# EAGLE board boost_converter2 (EAGLE 9.6.1)
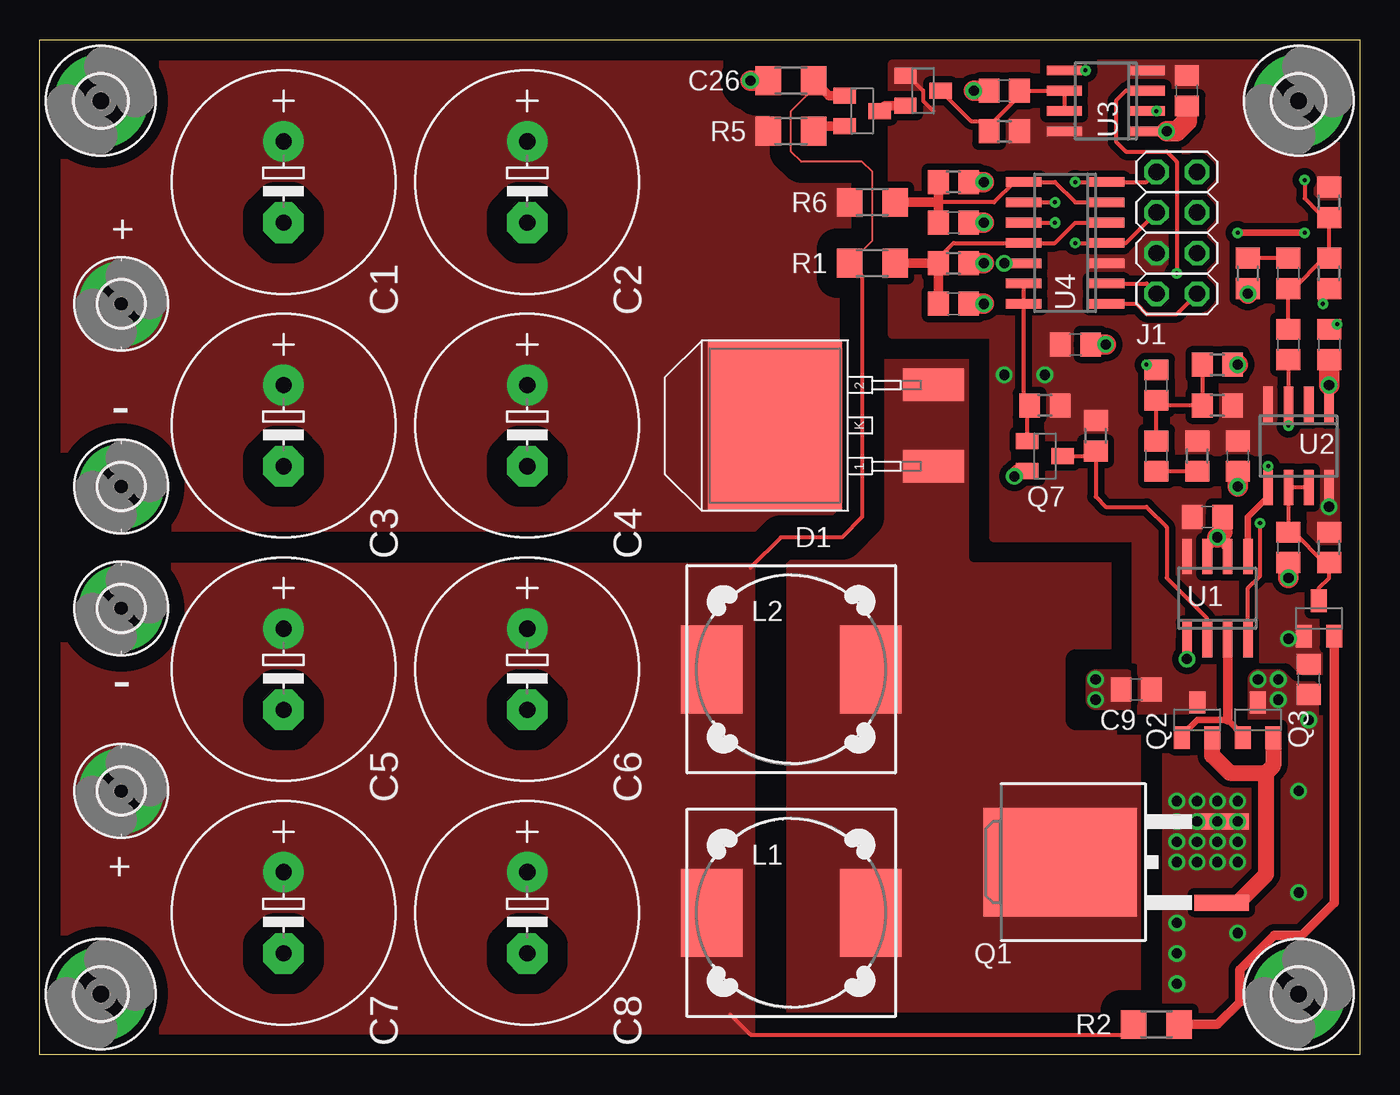
[diagram p0: board, top side]
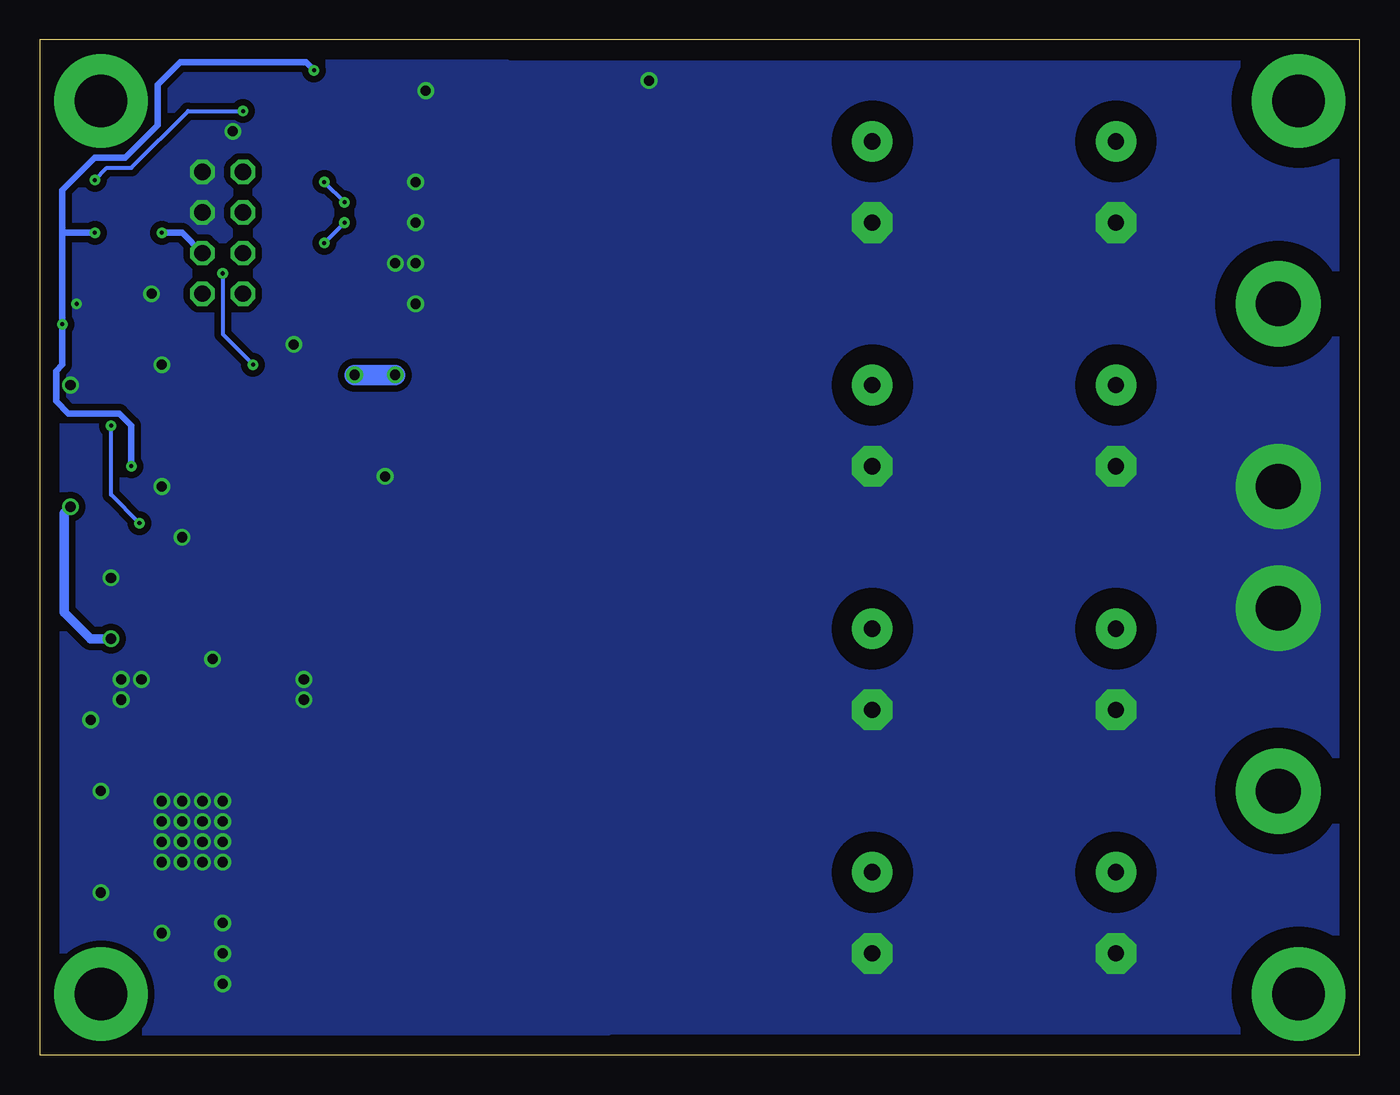
[diagram p1: board, bottom side, seen from below]

Size 82.55 x 63.5 mm. Coordinates in mm from the lower left corner, seen from the top.
Outline: 0,0 0,63.5 82.55,63.5 82.55,0 0,0
Copper layers (1*16): Top 0.035mm / dielectric 0.5mm / Bottom 0.035mm
Design rules "two_layer": minimum track width 5mil, minimum drill 10mil, track to track 5mil, track to pad 5mil, pad to pad 5mil, via to via 5mil, smd to smd 5mil, copper to edge 20mil, drill to drill 8mil, minimum pad ring 10mil, minimum via ring 8mil, stop-mask expansion 4mil, vias tented up to drill 0mil, thermal gap 10mil

## Footprints (pad centres in the part's own frame; a part is rotated, then mirrored left to right if it is on the bottom)
E5-13 = drill 1.016 pad 2.54: + -2.54,0 | drill 1.016 pad 2.54 octagon: - 2.54,0
C0805 = smd 1.3 x 1.5: 1 -0.95,0; 2 0.95,0
R1206 = smd 1.6 x 1.803: 1 -1.422,0; 2 1.422,0
TO263AB = smd 2.032 x 3.81: 1 -2.54,0; 2 2.54,0 | smd 10.668 x 8.382: K 0,9.906
3,3-PAD = drill 3.3 pad 5.842: B3,3 0,0
2X04 = drill 1.016 octagon: 1 -3.81,-1.27; 2 -3.81,1.27; 3 -1.27,-1.27; 4 -1.27,1.27; 5 1.27,-1.27; 6 1.27,1.27; 7 3.81,-1.27; 8 3.81,1.27
DR127 = smd 3.85 x 5.5: 1 -4.975,0; 2 4.975,0
2,8-PAD = drill 2.8 pad 5.334: B2,8 0,0
TO263 = smd 1 x 3.4: 1 -2.54,-6.6; 2 2.54,-6.6 | smd 6.8 x 9.6: 3 0,3.5
SOT23-BEC = smd 1 x 1.4: B -0.95,-1.1; C 0,1.1; E 0.95,-1.1
R0805 = smd 1.3 x 1.5: 1 -0.95,0; 2 0.95,0
SOIC8 = smd 0.6 x 2.2: 1 -1.905,-2.6; 2 -0.635,-2.6; 3 0.635,-2.6; 4 1.905,-2.6; 5 1.905,2.6; 6 0.635,2.6; 7 -0.635,2.6; 8 -1.905,2.6
SO14 = smd 0.6 x 2.2: 1 -3.81,-2.6; 2 -2.54,-2.6; 3 -1.27,-2.6; 4 0,-2.6; 5 1.27,-2.6; 6 2.54,-2.6; 7 3.81,-2.6; 8 3.81,2.6; 9 2.54,2.6; 10 1.27,2.6; 11 0,2.6; 12 -1.27,2.6; 13 -2.54,2.6; 14 -3.81,2.6

## Placement (x,y rotation side)
C1  [E5-13]  15.24,54.61 270 top
C2  [E5-13]  30.48,54.61 270 top
C3  [E5-13]  15.24,39.37 270 top
C4  [E5-13]  30.48,39.37 270 top
C5  [E5-13]  15.24,24.13 270 top
C6  [E5-13]  30.48,24.13 270 top
C7  [E5-13]  15.24,8.89 270 top
C8  [E5-13]  30.48,8.89 270 top
C9  10u  [C0805]  68.58,22.86 180 top
C10  330p  [C0805]  78.11,31.75 270 top
C11  330p  [C0805]  60.33,60.33 180 top
C12  1n  [C0805]  57.15,52.07 0 top
C13  1n  [C0805]  57.15,46.99 0 top
C14  100n  [C0805]  79.38,23.5 270 top
C15  10u  [C0805]  71.75,60.33 270 top
C16  100n  [C0805]  80.64,44.45 270 top
C17  10u  [C0805]  73.03,33.66 0 top
C18  10u  [C0805]  74.93,37.47 270 top
C19  10u  [C0805]  64.77,44.45 0 top
C22  10n  [C0805]  78.11,48.9 90 top
C23  22p  [C0805]  78.11,44.45 270 top
C24  22p  [C0805]  69.85,41.91 270 top
C25  10n  [C0805]  69.85,37.47 90 top
C26  100n  [R1206]  46.99,60.96 0 top
D1  [TO263AB]  55.88,39.37 90 top
E$13  [3,3-PAD]  3.81,59.69 0 top
E$14  [3,3-PAD]  3.81,3.81 0 top
E$15  [3,3-PAD]  78.74,3.81 0 top
E$16  [3,3-PAD]  78.74,59.69 0 top
J1  [2X04]  71.12,51.44 90 top
L1  10u  [DR127]  46.99,8.89 0 top
L2  10u  [DR127]  46.99,24.13 0 top
P1  [2,8-PAD]  5.08,46.99 0 top
P2  [2,8-PAD]  5.08,35.56 0 top
P3  [2,8-PAD]  5.08,27.94 0 top
P4  [2,8-PAD]  5.08,16.51 0 top
Q1  IPB200N25N3  [TO263]  67.31,12.06 90 top
Q2  4401  [SOT23-BEC]  72.39,20.95 0 top
Q3  4403  [SOT23-BEC]  76.2,20.95 0 top
Q4  3906  [SOT23-BEC]  80.01,27.3 0 top
Q5  3906  [SOT23-BEC]  55.24,60.33 270 top
Q6  5401  [SOT23-BEC]  51.44,59.05 270 top
Q7  4401  [SOT23-BEC]  62.87,37.47 270 top
R1  150k  [R1206]  52.07,49.53 0 top
R2  100k  [R1206]  69.85,1.91 0 top
R3  91k  [R0805]  80.64,31.75 270 top
R4  1M  [R0805]  60.33,57.78 180 top
R5  100k  [R1206]  46.99,57.78 0 top
R6  330k  [R1206]  52.07,53.34 0 top
R7  4.7k  [R0805]  57.15,49.53 0 top
R8  4.7k  [R0805]  57.15,54.61 0 top
R9  4.7k  [R0805]  66.04,38.73 90 top
R10  4.7k  [R0805]  62.87,40.64 0 top
R11  4.7k  [R0805]  80.64,53.34 90 top
R12  4.7k  [R0805]  80.64,48.9 90 top
R13  1k  [R0805]  75.56,48.9 270 top
R14  4.7k  [R0805]  73.66,40.64 180 top
R15  4.7k  [R0805]  73.66,43.18 180 top
R16  1k  [R0805]  72.39,37.47 270 top
U1  TLC555  [SOIC8]  73.66,28.57 0 top
U2  [SOIC8]  78.74,38.1 180 top
U3  [SOIC8]  66.67,59.69 90 top
U4  [SO14]  64.14,50.8 90 top

## Library data of the parts
C1-C19 C22-C26 R1-R16 U1-U4 = ref-packages
D1 = diode
E$13-E$16 P1-P4 = holes
J1 = pinhead
L1 L2 = inductors
Q1 = transistor-fet
Q2 Q7 = transistor-npn
Q3-Q6 = transistor-pnp

## Nets
!EN: Q7.C R9.1 U1.2
FB1: C13.1 R1.2 R7.1 U4.5 U4.11
FB2: C12.1 R6.2 R8.1 U4.6 U4.8
GATE: Q1.1 Q2.E Q3.E
GND: C1.- C2.- C3.- C4.- C5.- C6.- C7.- C8.- C9.2 C10.2 C11.2 C12.2 C13.2 C14.2 C15.2 C16.2 C17.2 C18.2 C19.2 C26.1 J1.5 J1.7 P2.B2,8 P3.B2,8 Q1.2 Q3.C Q7.E R7.2 R8.2 R12.1 R13.2 R15.1 U1.1 U1.6 U1.7 U2.1 U3.1 U4.12
LATCH: Q2.B Q3.B U1.3
S$1: C23.2 U1.4 U2.3
S$2: C11.1 Q5.C R4.2 U3.6 U3.7
S$3: C10.1 Q4.C R3.2 U2.6 U2.7
S$4: Q4.E R2.2
S$5: Q5.E Q6.C
S$6: Q6.E R5.2
S$7: Q7.B R10.1 U4.13 U4.14
S$8: J1.8 U4.7 U4.9
S$9: J1.6 U4.4 U4.10
S$10: J1.2 U4.2
S$11: J1.1 U4.1
S$12: C22.1 C23.1 R11.1 R12.2 U3.2
S$13: C22.2 R13.1
S$14: C25.1 R16.2
S$15: C24.2 C25.2 R14.2 R15.2
S$16: C24.1 U3.3
SW: D1.1 D1.2 L1.2 L2.2 Q1.3
VCC: C9.1 C14.1 C15.1 C17.1 C18.1 C19.1 J1.4 Q2.C Q4.B Q5.B R3.1 R4.1 R9.2 R10.2 R11.2 R14.1 R16.1 U1.8 U2.4 U2.8 U3.4 U3.8 U4.3
VIN: C5.+ C6.+ C7.+ C8.+ C26.2 L1.1 L2.1 P4.B2,8 Q6.B R1.1 R2.1
VOUT: C1.+ C2.+ C3.+ C4.+ D1.K P1.B2,8 R5.1 R6.1
VREF: C16.1 J1.3 U1.5 U2.5 U3.5

## Tracks (layer width: path | path; a pad name or v marks a point on that pad's centre or on a via)
!EN
  Top 0.254: Q7.C 65.72,37.47 R9.1 66.04,34.92 66.67,34.29 69.22,34.29 70.48,33.02 70.48,29.84 73.03,27.3 U1.2
FB1
  Top 0.254: R7.1 56.2,49.85 57.15,50.8 U4.11 63.5,50.8 64.77,52.07 U4.5
  Top 0.61: C13.1 R7.1 R1.2
FB2
  Top 0.254: 56.2,53.34 59.69,53.34 60.96,54.61 U4.8 63.5,54.61 64.77,53.34 U4.6
  Top 0.61: C12.1 56.2,53.34 | 56.2,53.34 R8.1 | R6.2 56.2,53.34
GATE
  Top 1.016: Q1.1 74.93,9.53 76.71,11.3 76.71,17.65 | Q3.E 77.15,18.09 76.71,17.65 | Q2.E 73.34,18.73 74.42,17.65 76.71,17.65
GND  (via drill 0.25, 0.64)
  Top 0.61: U1.1 v71.75,24.77 | U1.6 74.3,31.75 v73.66,32.38 73.03,31.75 U1.7 | U2.1 v80.64,41.91 | U3.1 v70.48,57.78 | U4.12 v60.33,49.53 | v80.26,46.99 80.26,47.56 R12.1
  Top 1.016: Q7.E 61.28,36.52 v60.96,36.2
  Top 1.27: C10.2 v78.11,29.84 | C11.2 v58.42,60.33 | R8.2 v59.05,54.61 | C12.2 v59.05,52.07 | R7.2 v59.05,49.53 | C13.2 v59.05,46.99 | C17.2 73.97,32.7 v73.66,32.38 | C15.2 71.75,58.42 71.12,57.78 v70.48,57.78 | C18.2 v74.93,35.56 | C19.2 v66.67,44.45 | R13.2 v75.56,47.62 | R15.1 v74.93,43.18 | C16.2 v80.64,41.91 | C26.1 v44.45,60.96
  other vias: 72.39,12.06 71.12,12.06 78.74,10.16 74.93,12.06 73.66,12.06 71.12,14.61 71.12,13.34 72.39,14.61 72.39,13.34 71.12,15.88 73.66,14.61 72.39,15.88 74.93,14.61 74.93,13.34 73.66,13.34 73.66,15.88 74.93,15.88 78.74,16.51 66.04,23.5 66.04,22.23 77.47,22.23 77.47,23.5 76.2,23.5 79.38,20.95 71.12,4.45 71.12,6.35 71.12,8.26 74.93,7.62
  pour Bottom (isolate 1.27, rank 6, no thermals): 1.27,62.23 81.28,62.23 81.28,1.27 1.27,1.27
  pour Top (isolate 0.406, rank 4, no thermals): 76.2,20.32 76.2,23.5 77.47,23.5 78.11,22.86 79.38,22.86 79.38,20.32
  pour Top (isolate 0.61, rank 4, no thermals): 66.04,22.23 66.04,23.5 67.94,23.5 67.94,22.23
  pour Top (isolate 0.406, rank 6, no thermals): 70.48,20.95 70.48,1.52 81.03,1.52 81.03,20.95
  pour Bottom (isolate 0.406, rank 6, no thermals): 53.34,61.98 81.03,61.98 81.03,1.52 46.99,1.52 46.99,45.09 53.34,51.44
LATCH
  Top 0.406: 71.44,20 72.39,20.95 74.3,20.95 75.25,20
  Top 0.508: Q2.B 71.44,20 | 75.25,20 Q3.B
  Top 0.61: 74.3,20.95 U1.3
S$1  (via drill 0.25)
  Top 0.254: U1.4 75.56,29.21 76.33,29.97 v76.33,33.27 | v78.11,39.37 U2.3 C23.2
  Bottom 0.254: v76.33,33.27 78.11,35.05 v78.11,39.37
S$2
  Top 0.254: U3.7 U3.6 C11.1 61.27,60.01 59.38,58.1 R4.2 59.38,58.1 59.05,58.42 58.25,58.42 Q5.C
S$3
  Top 0.254: Q4.C 80.01,29.21 80.64,29.84 R3.2 80.33,30.8 78.42,32.7 C10.1 U2.6 U2.7
S$4
  Top 0.61: Q4.E 80.96,9.53 78.93,7.49 77.22,7.49 75.06,5.33 75.06,3.3 73.66,1.91 R2.2
S$5
  Top 0.61: Q6.C 52.85,59.38 Q5.E
S$6
  Top 0.61: R5.2 48.73,58.1 Q6.E
S$7
  Top 0.254: U4.13 U4.14 61.53,40.64 R10.1 61.77,40.49 Q7.B
S$8  (via drill 0.25)
  Top 0.254: U4.9 v63.5,53.34 | v64.77,54.61 U4.7 69.22,54.61 J1.8
  Bottom 0.254: v64.77,54.61 v63.5,53.34
S$9  (via drill 0.25)
  Top 0.254: U4.10 v63.5,52.07 | v64.77,50.8 U4.4 67.94,50.8 J1.6
  Bottom 0.254: v64.77,50.8 v63.5,52.07
S$10
  Top 0.254: U4.2 69.22,48.26 J1.2
S$11
  Top 0.254: J1.1 71.12,46.35 69.22,46.35 68.58,46.99 U4.1
S$12  (via drill 0.25)
  Top 0.254: C23.1 C22.1 78.42,47.95 80.33,49.84 R12.2 R11.1 80.33,52.7 80.01,52.7 79.12,53.59 v79.12,54.74 | v69.85,59.05 U3.2
  Bottom 0.254: v79.12,54.74 78.36,55.5 76.83,55.5 73.28,59.05 v69.85,59.05
S$13
  Top 0.254: C22.2 R13.1
S$14
  Top 0.254: C25.1 R16.2
S$15
  Top 0.254: R15.2 R14.2 70.17,40.64 70.01,40.8 | 70.01,40.8 C24.2 | C25.2 69.85,40.64 70.01,40.8
S$16  (via drill 0.25)
  Top 0.254: C24.1 69.53,42.86 v69.22,43.18 | U3.3 67.94,60.33 67.31,59.69 67.31,57.15 67.94,56.52 70.48,56.52 71.12,55.88 v71.12,48.9
  Bottom 0.254: v71.12,48.9 71.12,45.09 v69.22,43.18
SW
  pour Top (isolate 1.27, rank 6, no thermals): 46.99,31.75 52.07,31.75 52.07,62.23 68.58,62.23 68.58,1.27 46.99,1.27
VCC  (via drill 0.64)
  Top 0.254: 54.3,61.27 55.24,60.33 55.24,59.69 55.88,59.05
  Top 0.406: Q5.B 54.3,61.27
  Bottom 0.61: v78.11,26.04 79.38,26.04 81.03,27.69 81.03,33.91 v80.64,34.29
  Bottom 1.27: v60.33,42.55 v62.87,42.55
  pour Top (isolate 0.406, rank 5, no thermals): 68.58,21.59 68.58,32.38 59.69,32.38 59.69,45.09 53.34,45.09 53.34,61.98 81.03,61.98 81.03,21.59
VIN
  Top 0.127: R1.1 52.07,50.95 52.07,55.24 51.44,55.88 47.62,55.88 46.99,56.52 46.99,59.05 48.41,60.48 C26.2
  Top 0.254: 43.18,2.54 44.45,1.27 67.79,1.27 R2.1 | 44.45,30.48 46.35,32.38 50.16,32.38 51.44,33.66 51.44,48.74 R1.1
  Top 0.61: Q6.B 49.37,60.01 C26.2
  pour Top (isolate 1.27, rank 6, no thermals): 1.27,30.48 1.27,1.27 44.45,1.27 44.45,30.48
VOUT
  pour Top (isolate 1.27, rank 6, no thermals): 1.27,62.23 1.27,33.02 50.8,33.02 50.8,62.23
VREF  (via drill 0.25)
  Top 0.406: U1.5 75.56,33.66 76.83,34.92 U2.5 v76.83,36.83 | U3.5 v65.41,61.59 | C16.1 80.97,45.72 v81.15,45.72 | v74.93,51.44 v79.12,51.44
  Bottom 0.406: v65.41,61.59 65.91,62.1 73.79,62.1 75.18,60.71 75.18,58.17 77.22,56.13 79.12,56.13 81.15,54.1 81.15,51.44 | v76.83,36.83 76.83,39.37 77.6,40.13 80.77,40.13 81.53,40.89 81.53,42.8 81.15,43.18 v81.15,45.72 81.15,51.44 | J1.3 73.66,51.44 v74.93,51.44 | v79.12,51.44 81.15,51.44

## Text on the board
tPlace: + | - | - | +